# EAGLE board NPSS2 (EAGLE 9.7.0)

Size 195.18 x 67.83 mm. Coordinates in mm from the lower left corner, seen from the top.
Outline: 0,0 195.18,0 195.18,67.83 0,67.83 0,0
Copper layers (1*16): Top 0.035mm / dielectric 1.5mm / Bottom 0.035mm
Design rules "default": minimum track width 6mil, minimum drill 0.35mm, track to track 6mil, track to pad 6mil, pad to pad 6mil, via to via 6mil, smd to smd 6mil, copper to edge 40mil, drill to drill 6mil, minimum pad ring 10mil, minimum via ring 8mil, stop-mask expansion 4mil, vias tented up to drill 0mil, thermal gap 10mil

## Footprints (pad centres in the part's own frame; a part is rotated, then mirrored left to right if it is on the bottom)
WS2812-STRIP = drill 1.016 long: 1 -3.81,0; 2 -1.27,0; 3 1.27,0; 4 3.81,0
1X08 = drill 1.016 long: 1 -8.89,0; 2 -6.35,0; 3 -3.81,0; 4 -1.27,0; 5 1.27,0; 6 3.81,0; 7 6.35,0; 8 8.89,0
ARDUINO-UNO-R3-SHIELD = drill 1.016 pad 1.88: 3.3V 24.13,-2.54; 5V 24.13,0; A0 24.13,12.7; A1 24.13,15.24; A2 24.13,17.78; A3 24.13,20.32; A4 24.13,22.86; A5 24.13,25.4; AREF -24.13,-13.97; D2 -24.13,20.32; D3 -24.13,17.78; D4 -24.13,15.24; D5 -24.13,12.7; D6 -24.13,10.16; D7 -24.13,7.62; D8 -24.13,3.81; D9 -24.13,1.27; D10 -24.13,-1.27; D11 -24.13,-3.81; D12 -24.13,-6.35; D13 -24.13,-8.89; GND@0 24.13,2.54; GND@1 24.13,5.08; GND@2 -24.13,-11.43; IOREF 24.13,-7.62; NC 24.13,-10.16; RES 24.13,-5.08; RX -24.13,25.4; SCL -24.13,-19.05; SDA -24.13,-16.51; TX -24.13,22.86; VIN 24.13,7.62

## Placement (x,y rotation side)
JEWEL1  WS2812B_STRIP  [WS2812-STRIP]  187.44,57.68 0 top
KEYPAD1  KEYPAD-4X4  [1X08]  64.65,57.78 0 top
LED10  WS2812B_STRIP  [WS2812-STRIP]  93.41,59.5 270 top
LED15  WS2812B_STRIP  [WS2812-STRIP]  93.46,49.19 270 top
LED16  WS2812B_STRIP  [WS2812-STRIP]  93.62,28.62 270 top
LED17  WS2812B_STRIP  [WS2812-STRIP]  93.57,38.93 270 top
LED18  WS2812B_STRIP  [WS2812-STRIP]  93.76,7.75 270 top
LED19  WS2812B_STRIP  [WS2812-STRIP]  93.71,18.05 270 top
U1  ARDUINO-UNO-R3-SHIELD  [ARDUINO-UNO-R3-SHIELD]  47.88,33.65 270 top

## Library data of the parts
JEWEL1 KEYPAD1 LED10 LED15-LED19 U1 = Tinkercad

## Nets
LED10_DIN: LED10.1 LED15.4
LED10_DOUT: JEWEL1.1 LED10.4
LED15_DIN: LED15.1 LED17.4
LED17_DIN: LED16.4 LED17.1
LED18_DOUT: LED18.4 LED19.1
LED19_DOUT: LED16.1 LED19.4
U1_5V: JEWEL1.2 LED10.2 LED15.2 LED16.2 LED17.2 LED18.2 LED19.2 U1.5V
U1_D2: KEYPAD1.6 U1.D2
U1_D3: KEYPAD1.5 U1.D3
U1_D4: KEYPAD1.4 U1.D4
U1_D5: KEYPAD1.3 U1.D5
U1_D6: KEYPAD1.2 U1.D6
U1_D7: KEYPAD1.1 U1.D7
U1_D8: LED18.1 U1.D8
U1_GND: JEWEL1.3 LED10.3 LED15.3 LED16.3 LED17.3 LED18.3 LED19.3 U1.GND@0 U1.GND@1 U1.GND@2
U1_RX: KEYPAD1.8 U1.RX
U1_TX: KEYPAD1.7 U1.TX

## Tracks (layer width: path | path; a pad name or v marks a point on that pad's centre or on a via)
LED10_DIN  (1 unrouted)
LED10_DOUT  (1 unrouted)
LED15_DIN  (1 unrouted)
LED17_DIN  (1 unrouted)
LED18_DOUT  (1 unrouted)
LED19_DOUT  (1 unrouted)
U1_5V  (7 unrouted)
U1_D2  (1 unrouted)
U1_D3  (1 unrouted)
U1_D4  (1 unrouted)
U1_D5  (1 unrouted)
U1_D6  (1 unrouted)
U1_D7  (1 unrouted)
U1_D8  (1 unrouted)
U1_GND  (9 unrouted)
U1_RX  (1 unrouted)
U1_TX  (1 unrouted)